# EAGLE board adc (EAGLE 6.1)
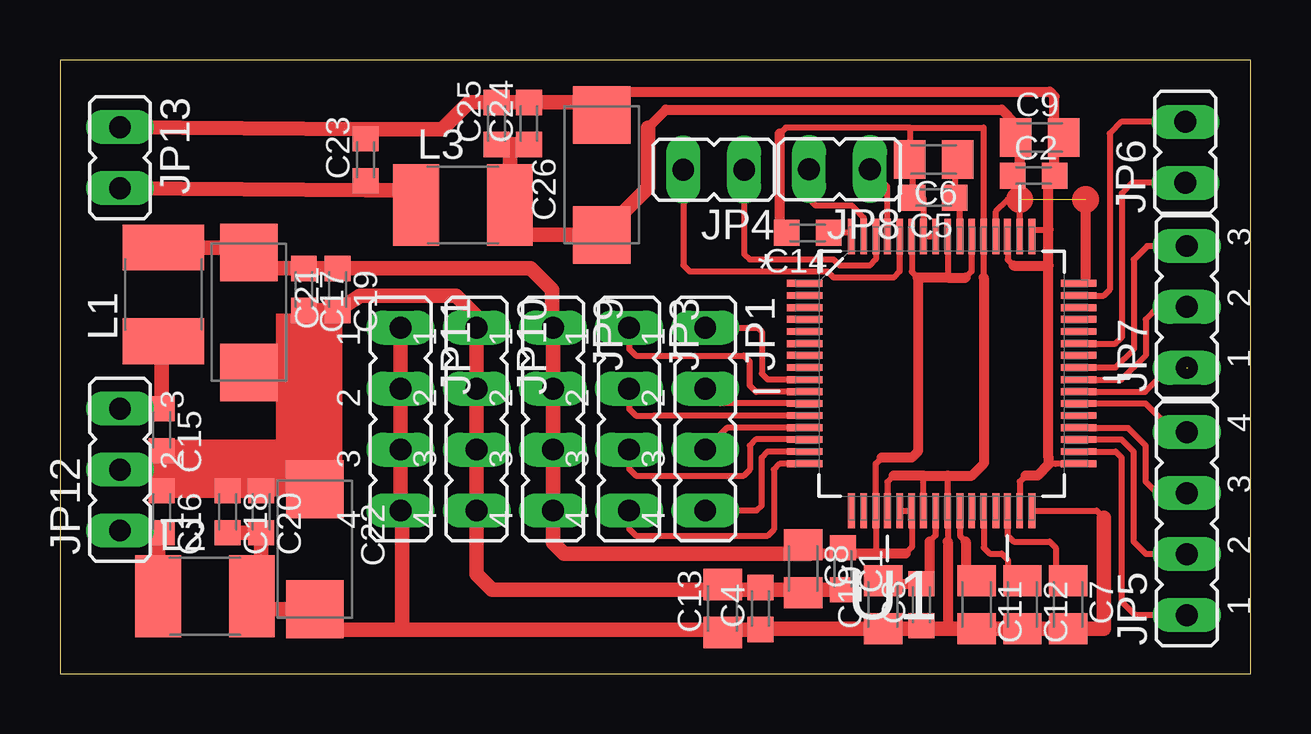
[diagram p0: board, top side]

Size 49.63 x 25.57 mm. Coordinates in mm from the lower left corner, seen from the top.
Outline: 0,0 49.63,0 49.63,25.57 0,25.57 0,0
Copper layers (1*16): Top 0.035mm / dielectric 1.5mm / Bottom 0.035mm
Design rules: minimum track width 10mil, minimum drill 24mil, track to track 8mil, track to pad 8mil, pad to pad 8mil, via to via 8mil, smd to smd 8mil, copper to edge 40mil, drill to drill 8mil, minimum pad ring 10mil, minimum via ring 8mil, stop-mask expansion 4mil, vias tented up to drill 0mil, thermal gap 10mil

## Footprints (pad centres in the part's own frame; a part is rotated, then mirrored left to right if it is on the bottom)
C0603K = smd 1.05 x 1.08: 1 -0.875,0; 2 0.875,0
C0805K = smd 1.3 x 1.6: 1 -1,0; 2 1,0
SMC_C = smd 2.4 x 2.4: + -2.5,0; - 2.5,0
JP4 = drill 0.914 long: 1 -3.81,0; 2 -1.27,0; 3 1.27,0; 4 3.81,0
JP1 = drill 0.914 long: 1 0,-1.27; 2 0,1.27
JP2 = drill 0.914 long: 1 -2.54,0; 2 0,0; 3 2.54,0
L1812 = smd 1.9 x 3.4: 1 -1.95,0; 2 1.95,0
QFP50P1200X1200X120-64N = smd 1.473 x 0.279: 1 -5.715,3.759; 2 -5.715,3.251; 3 -5.715,2.743; 4 -5.715,2.261; 5 -5.715,1.753; 6 -5.715,1.245; 7 -5.715,0.762; 8 -5.715,0.254; 9 -5.715,-0.254; 10 -5.715,-0.762; 11 -5.715,-1.245; 12 -5.715,-1.753; 13 -5.715,-2.261; 14 -5.715,-2.743; 15 -5.715,-3.251; 16 -5.715,-3.759; 33 5.715,-3.759; 34 5.715,-3.251; 35 5.715,-2.743; 36 5.715,-2.261; 37 5.715,-1.753; 38 5.715,-1.245; 39 5.715,-0.762; 40 5.715,-0.254; 41 5.715,0.254; 42 5.715,0.762; 43 5.715,1.245; 44 5.715,1.753; 45 5.715,2.261; 46 5.715,2.743; 47 5.715,3.251; 48 5.715,3.759 | smd 0.279 x 1.473: 17 -3.759,-5.715; 18 -3.251,-5.715; 19 -2.743,-5.715; 20 -2.261,-5.715; 21 -1.753,-5.715; 22 -1.245,-5.715; 23 -0.762,-5.715; 24 -0.254,-5.715; 25 0.254,-5.715; 26 0.762,-5.715; 27 1.245,-5.715; 28 1.753,-5.715; 29 2.261,-5.715; 30 2.743,-5.715; 31 3.251,-5.715; 32 3.759,-5.715; 49 3.759,5.715; 50 3.251,5.715; 51 2.743,5.715; 52 2.261,5.715; 53 1.753,5.715; 54 1.245,5.715; 55 0.762,5.715; 56 0.254,5.715; 57 -0.254,5.715; 58 -0.762,5.715; 59 -1.245,5.715; 60 -1.753,5.715; 61 -2.261,5.715; 62 -2.743,5.715; 63 -3.251,5.715; 64 -3.759,5.715

## Placement (x,y rotation side)
C1  100n  [C0603K]  32.63,4.37 270 top
C2  100n  [C0603K]  40.58,20.75 0 top
C3  100n  [C0603K]  35.9,2.87 90 top
C4  100n  [C0603K]  29.2,2.71 90 top
C5  100n  [C0603K]  36.42,19.83 180 top
C6  1u  [C0805K]  36.42,21.42 180 top
C7  1u  [C0805K]  42.02,2.87 270 top
C8  1u  [C0805K]  30.98,4.37 270 top
C9  1u  [C0805K]  40.83,22.34 0 top
C10  10u  [C0805K]  34.3,2.87 90 top
C11  1u  [C0805K]  38.21,2.87 270 top
C12  10u  [C0805K]  40.12,2.87 270 top
C13  1u  [C0805K]  27.62,2.71 90 top
C14  100p  [C0603K]  31.17,18.36 180 top
C15  100n  [C0603K]  4.24,10.16 270 top
C16  100n  [C0603K]  4.24,6.74 270 top
C17  100p  [C0603K]  10.16,16 270 top
C18  100p  [C0603K]  6.99,6.75 270 top
C19  100n  [C0603K]  11.57,16 270 top
C20  100n  [C0603K]  8.39,6.75 270 top
C21  47u  [SMC_C]  7.88,15.05 270 top
C22  47u  [SMC_C]  10.62,5.18 270 top
C23  100n  [C0603K]  12.73,21.41 90 top
C24  100p  [C0603K]  19.55,22.92 90 top
C25  100n  [C0603K]  18.2,22.92 90 top
C26  47u  [SMC_C]  22.58,20.78 90 top
JP1  AINneg  [JP4]  26.89,10.61 270 top
JP3  AINpos  [JP4]  23.72,10.61 270 top
JP4  RL2  [JP1]  27.25,21 90 top
JP5  CTRL2  [JP4]  46.97,6.25 90 top
JP6  CTRL1  [JP1]  46.91,21.71 0 top
JP7  CTRL2  [JP2]  46.97,15.28 90 top
JP8  RL1  [JP1]  32.49,21.02 90 top
JP9  AINvdd  [JP4]  20.55,10.61 270 top
JP10  AINgnd  [JP4]  17.37,10.61 270 top
JP11  AINvss  [JP4]  14.2,10.61 270 top
JP12  PWR1  [JP2]  2.5,8.5 90 top
JP13  PWR2  [JP1]  2.5,21.5 180 top
L1  22u  [L1812]  4.32,15.79 90 top
L2  22u  [L1812]  6.04,3.22 0 top
L3  22u  [L1812]  16.8,19.52 0 top
U1  ADS1194CPAG  [QFP50P1200X1200X120-64N]  36.75,12.5 0 top

## Library data of the parts
C1-C26 L1-L3 = rcl
JP1 JP3-JP13 = jumper
U1 = adc-ti; DESCRIPTION: Analog Front-End for Biopotential Measurements; MPN: ADS1194CPAG; OC_FARNELL: 1855110; OC_NEWARK: 13T1868; PACKAGE: TQFP-64; SUPPLIER: Texas Instruments

## Nets
+2V5: C1.1 C8.1 C17.1 C19.1 C21.+ JP9.1 JP9.2 JP9.3 JP9.4 L1.2 U1.19 U1.21 U1.22 U1.54 U1.56 U1.59
+2V5/1: C15.1 JP12.3 L1.1
+3V3: C2.1 C9.1 C24.1 C25.1 C26.+ L3.2 U1.48 U1.50 U1.52
+3V3/1: C23.1 JP13.2 L3.1
-2V5: C3.1 C4.1 C5.2 C6.2 C7.2 C10.1 C11.2 C12.2 C13.1 C14.2 C18.2 C20.2 C22.- JP11.1 JP11.2 JP11.3 JP11.4 L2.2 U1.20 U1.23 U1.25 U1.32 U1.53 U1.57 U1.58
-2V5/1: C16.2 JP12.1 L2.1
AGND: C1.2 C4.2 C8.2 C13.2 C15.2 C16.1 C17.2 C18.1 C19.2 C20.1 C21.- C22.+ JP10.1 JP10.2 JP10.3 JP10.4 JP12.2
DAISY_IN: JP7.3 U1.41
DIN: JP5.1 U1.34
DOUT: JP6.1 U1.43
GND: C2.2 C9.2 C23.2 C24.2 C25.2 C26.- JP13.1 U1.31 U1.33 U1.49 U1.51
N$1: C3.2 C10.2 U1.24
N$2: C5.1 C6.1 U1.55
N$3: C7.1 U1.30
N$4: C12.1 U1.28
N$5: C11.1 U1.26
N$6: JP1.4 U1.15
N$7: C14.1 U1.64
N$8: JP1.3 U1.13
N$9: JP1.2 U1.11
N$10: JP1.1 U1.9
N$11: JP3.1 U1.10
N$12: JP3.4 U1.16
N$13: JP3.3 U1.14
N$14: JP3.2 U1.12
N$15: JP4.1 U1.62
N$16: JP4.2 U1.60
N$17: JP8.1 U1.61
N$24: JP8.2 U1.63
SCLK: JP7.2 U1.40
START: JP5.4 U1.38
~CS: JP7.1 U1.39
~DRDY: JP6.2 U1.47
~PWDN: JP5.2 U1.35
~RESET: JP5.3 U1.36

## Tracks (layer width: path | path; a pad name or v marks a point on that pad's centre or on a via)
+2V5
  Top 0.254: 34.25,9 34,8.75 34.01,8.74 U1.19 34.01,5.01 34,5 | U1.59 35.51,16.75 35.75,16.5 | U1.54 37.99,16.75 37.75,16.5 | U1.56 37,16.5 | 31.23,5.25 31.23,5.03 31.25,5 | C1.1 32.63,5.13 32.5,5 | 35.25,5 35.51,5.25 U1.22 U1.21
  Top 0.406: 35.25,5 34,5 32.5,5 31.25,5 | 37.75,16.5 37,16.5 35.75,16.5 35.75,9.25 35.5,9 34.25,9
  Top 0.61: 31.23,5.25 C8.1 | L1.2 7.88,17.75 C21.+ 7.88,16.88 C17.1 C19.1 19.62,16.88 20.5,16 20.5,14.46 JP9.1 JP9.2 JP9.3 JP9.4 20.55,5.46 21,5 31.25,5
+2V5/1
  Top 0.61: L1.1 4.24,13.85 C15.1 JP12.3
+3V3  (3 unrouted)
  Top 0.254: U1.50 40,19.75 39.5,19.75 39.01,19.26 U1.52 | U1.48 42.75,16.26 42.75,16.5
  Top 0.406: 42.75,16.5 42.75,19.75 | C26.+ 22.58,18.33 | 24.5,22.75 25.25,23.5 39.25,23.5 39.83,22.92 C9.1 40,22.17 40,20.75 | 40,19.75 40,20.25 40,20.75 | C2.1 40,20.75
  Top 0.61: C25.1 18.75,22.05 | 18.75,22.05 C24.1 | 18.75,22.05 L3.2 18.75,18.28 C26.+ | 22.58,18.33 24.5,20.25 24.5,22.75
+3V3/1
  Top 0.406: C23.1 12.73,20.16 12.75,20.14
  Top 0.61: JP13.2 12.75,20.14 13.25,20.14 | 13.25,20.14 14.23,20.14 L3.1 | 13.23,20.16 13.25,20.14
-2V5
  Top 0.254: U1.57 U1.58 35.99,19.83 C5.2 35.54,21.42 C6.2 | 35.42,22.75 38.5,22.75 U1.53 38.5,16.5 | 35.42,22.75 C6.2 | C6.2 35.42,21.25 35.5,21.25 | 30,18.36 C14.2 | C10.1 34.55,2.08 | 37,8.25 U1.25 37,5.5 | 34.75,8.25 34.49,7.99 U1.20 | U1.23 35.99,8.25 | U1.32 43.22,6.79 43.5,6.5 | 35.42,22.75 30.25,22.75 30,22.5
  Top 0.406: C13.1 28.12,1.83 | C4.1 29.7,1.87 | 36.15,1.87 C3.1 | 34.75,8.25 35.99,8.25 37,8.25 38,8.25 38.5,8.75 38.5,16.5 | 37,5.5 37,1.87 | 30,18.36 30,22.5
  Top 0.61: JP11.1 JP11.2 JP11.3 JP11.4 14.25,6.79 14.25,1.83 | C4.1 28.12,1.83 14.25,1.83 | 29.7,1.87 C10.1 36.15,1.87 37,1.87 C11.2 C12.2 C7.2 43.5,1.87 43.5,6.5 | 14.25,1.83 10.75,1.83 10.75,2.5 10.62,2.5 C22.- 8,2.68 L2.2 8.39,3.22 C20.2 C18.2
-2V5/1
  Top 0.61: JP12.1 4.24,5.97 C16.2 4.09,5.87 L2.1
AGND
  Top 0.254: 32.88,3.62 C1.2
  Top 0.61: 29.7,3.5 C1.2 31.23,3.5 C8.2 | C4.2 29.7,3.5 | C13.2 28.12,3.5 | 28.12,3.5 29.7,3.5 | C22.+ 10,7.68 | 10,7.68 8.39,7.68 C20.1 C18.1 C16.1 4.24,8.51 | C15.2 4.24,8.51 | 10,12.55 10,15.13 C17.2 C19.2 12.5,15.75 16.5,15.75 17.37,14.88 JP10.1 JP10.2 JP10.3 JP10.4 17.37,4.13 18,3.5 20,3.5 28.12,3.5 | 10,12.55 10,7.68 | JP12.2 4.24,8.51 | C21.- 10,12.55
DAISY_IN
  Top 0.254: U1.41 44,12.75 44.75,13.5 44.75,17.25 45.31,17.82 JP7.3
DIN
  Top 0.254: U1.34 44,9.25 44.25,9 44.25,3 44.81,2.44 JP5.1
DOUT
  Top 0.254: U1.43 43.99,13.74 44.25,14 44.25,20 44.7,20.45 JP6.1
GND
  Top 0.254: U1.49 40.51,18.5 41.21,18.5 | 40.25,8.25 40,8 U1.31 | U1.33 41.5,8.74 | 41.5,8.74 41.5,8.75 | 41.5,8.74 41.21,8.74 41.21,9 | U1.51 39.5,17.25 39.75,17
  Top 0.406: 22.07,23.8 C26.- 22.58,24.25 41.25,24.25 41.46,24.04 41.46,22.25 | 41.21,17 41.21,9 41.21,8.71 40.75,8.25 40.25,8.25 | 41.21,17 41.21,18.5 41.21,20.75 C2.2 41.46,22.25 | 39.75,17 41.21,17 | C23.2 12.73,22.66 12.75,22.68 | 15.93,22.68 15.57,22.68 15.5,22.75 | C9.2 41.55,22.34 41.46,22.25
  Top 0.61: JP13.1 12.75,22.68 15.93,22.68 17.05,23.8 C25.2 C24.2 22.07,23.8
N$1
  Top 0.254: U1.24 36.5,5.75 36.25,5.5
  Top 0.406: C10.2 34.55,3.75 C3.2 36.25,3.75 36.25,5.5
N$2
  Top 0.254: U1.55 37.51,19.83 C5.1 37.29,21.42 C6.1
N$3
  Top 0.254: U1.30 39.49,5.76 39.75,5.5 41.25,5.5 41.5,5.25 41.5,3.87
  Top 0.406: 41.5,3.87 C7.1
N$4
  Top 0.254: U1.28 38.5,5.25 38.75,5 39.25,5 39.5,4.75 39.5,3.87 C12.1
N$5
  Top 0.254: U1.26 37.51,5.74 37.75,5.5
  Top 0.406: 37.75,5.5 37.75,4.33 C11.1
N$6
  Top 0.254: U1.15 29.5,9.25 29.25,9 29.25,7 29.05,6.79 JP1.4
N$7
  Top 0.254: U1.64 32.99,18.36 C14.1
N$8
  Top 0.254: U1.13 27.8,10.24 JP1.3
N$9
  Top 0.254: U1.11 27.52,11.26 JP1.2
N$10
  Top 0.254: U1.9 29.5,12.25 29.25,12.5 29.25,14.25 29.09,14.41 JP1.1
N$11
  Top 0.254: JP3.1 23.72,13.53 24,13.25 28.5,13.25 28.75,13 28.75,12 29.01,11.74 U1.10
N$12
  Top 0.254: U1.16 29.99,8.74 29.75,8.5 29.75,6 29.5,5.75 24,5.75 23.72,6.03 JP3.4
N$13
  Top 0.254: JP3.3 23.72,8.53 24,8.25 28.5,8.25 28.75,8.5 28.75,9.5 29.01,9.76 U1.14
N$14
  Top 0.254: U1.12 24.75,10.75 24,10.75 23.72,11.03 JP3.2
N$15
  Top 0.254: U1.62 34.01,17.26 33.75,17 32.5,17 32.25,17.25 28.75,17.25 28.52,17.48 JP4.1
N$16
  Top 0.254: U1.60 35,16.75 34.75,16.5 32.25,16.5 32,16.75 26.25,16.75 25.98,17.02 JP4.2
N$17
  Top 0.254: U1.61 34.49,20.29 JP8.1
N$24
  Top 0.254: U1.63 33.5,19 33,19.5 31.5,19.5 31.25,19.75 31.25,20.99 JP8.2
SCLK
  Top 0.254: U1.40 44.25,12.25 45.25,13.25 45.25,14.75 45.77,15.28 JP7.2
START
  Top 0.254: U1.38 45.24,11.26 46.45,10.05 JP5.4
~CS  (2 unrouted)
  Top 0.254: U1.39 45.24,11.74 46.25,12.75 47,12.75
~DRDY
  Top 0.254: U1.47 43.5,15.75 43.75,16 43.75,22.5 44.23,22.98 JP6.2
~PWDN
  Top 0.254: U1.35 44.24,9.76 44.75,9.25 44.75,5.5 45.27,4.97 JP5.2
~RESET
  Top 0.254: U1.36 44.51,10.24 45.25,9.5 45.25,8 45.73,7.51 JP5.3
(copper drawn outside any net)
  shapes: Top area x2, Top circle x2

## Text on the board
Reference: DGND | MindSpy.org | ~DRDY | DOUT | +3V3 | ver 0.1 | DAISY | SCLK | ~CS | +2V5 | START | AGND | ~RESET | ~PWRDN | -2V5 | DIN